# EAGLE board Module-WiFi-M0-v0.5-Board 2 (EAGLE 7.7.0)
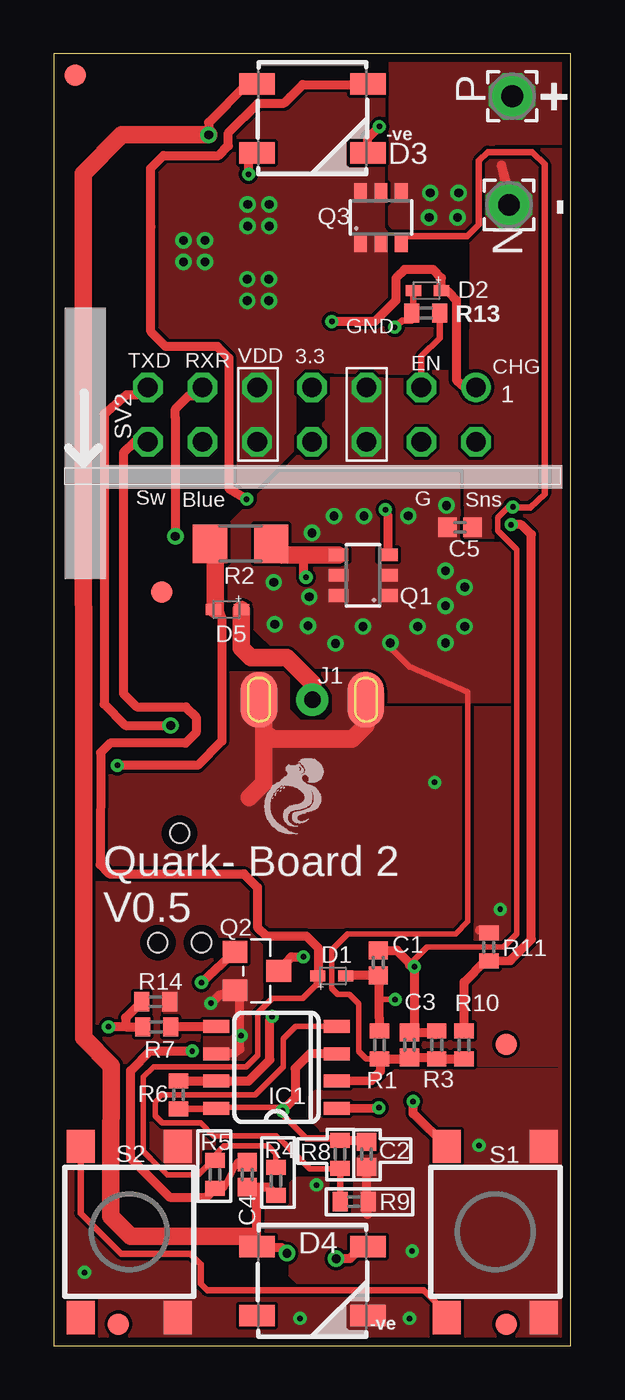
[diagram p0: board, top side]
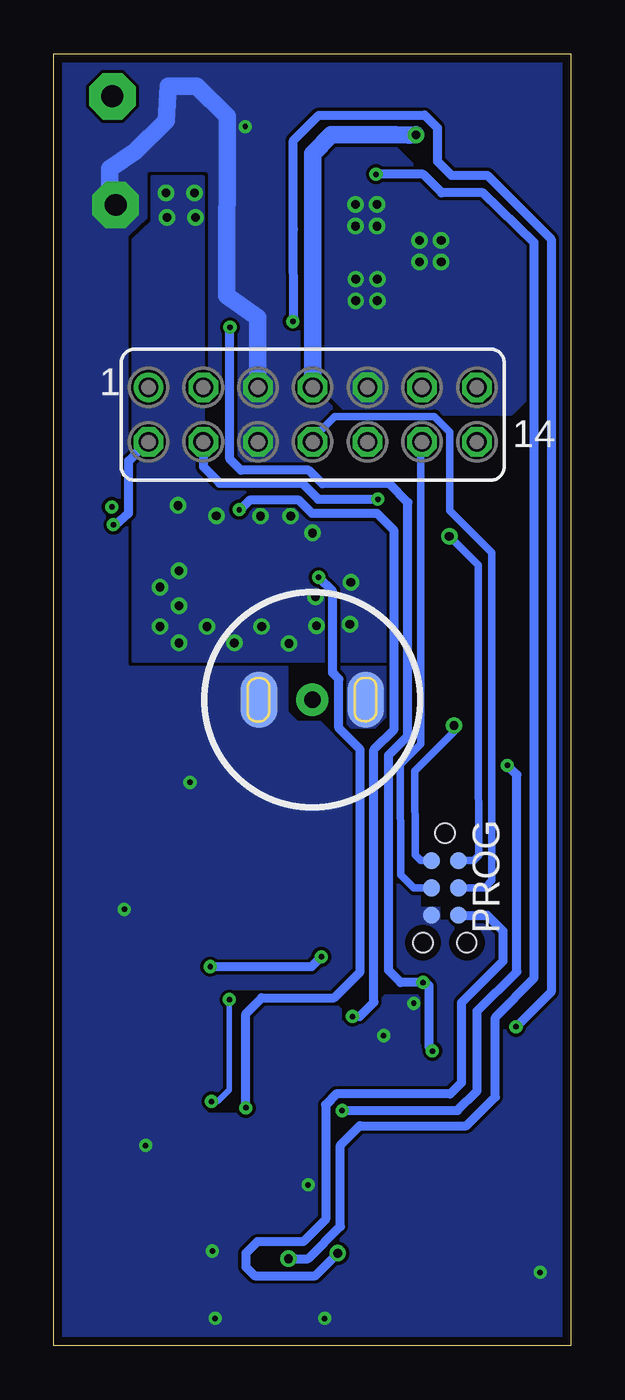
[diagram p1: board, bottom side, seen from below]

Size 24 x 60 mm. Coordinates in mm from the lower left corner, seen from the top.
Outline: 0,60 0,0 24,0 24,60 0,60
Copper layers (1*16): Top 0.0356mm / dielectric 1.5011mm / Bottom 0.0356mm
Design rules "oshpark-2layer-via-buried": minimum track width 6mil, minimum drill 10mil, track to track 6mil, track to pad 6mil, pad to pad 6mil, via to via 6mil, smd to smd 6mil, copper to edge 15mil, drill to drill 6mil, minimum pad ring 7mil, minimum via ring 7mil, stop-mask expansion 2.5mil, vias tented up to drill 16mil, thermal gap 10mil
tRestrict: 43 lines
bRestrict: 18 lines

## Footprints (pad centres in the part's own frame; a part is rotated, then mirrored left to right if it is on the bottom)
0402-CAP = smd 0.85 x 0.9: 1 -0.58,0; 2 0.58,0
SOD523 = smd 0.7 x 0.5: A 0.7,0; C -0.6,0
WS2812B = smd 1.651 x 1: 1 -2.577,1.6; 2 -2.577,-1.6; 3 2.577,-1.6; 4 2.577,1.6
SOIC-8-TIGHT = smd 0.6 x 1.2: 1 -1.905,-2.8; 2 -0.635,-2.8; 3 0.635,-2.8; 4 1.905,-2.8; 5 1.905,2.8; 6 0.635,2.8; 7 -0.635,2.8; 8 -1.905,2.8
CONN-MAG = smd 1.7 x 2.6 bottom: GND@1 -2.475,0; GND@4 2.475,0 | smd 1.7 x 2.6: GND@2 2.475,0; GND@3 -2.475,0 | drill 0.762 pad 1.5: POS 0,0
2,15/1,0 = drill 1.016 pad 2.159 octagon: 1 0,0
TC2030-MCP-NL = smd 0.787 x 0.787: 1 1.27,-0.635; 2 1.27,0.635; 3 2.54,-0.635; 4 2.54,0.635; 5 3.81,-0.635; 6 3.81,0.635 | hole 0.889: 0,0; 5.08,-1.016; 5.08,1.016
SOT23-6 = smd 0.6 x 0.9: 1 -0.95,-1.15; 2 0,-1.15; 3 0.95,-1.15; 4 0.95,1.15; 5 0,1.15; 6 -0.95,1.15
SOT-23 = smd 1.016 x 1.143: 1 -0.889,-1.016; 2 0.889,-1.016; 3 0,1.016
R0402 = smd 0.7 x 0.9: 1 -0.65,0; 2 0.65,0
R1206 = smd 1.6 x 1.803: 1 -1.422,0; 2 1.422,0
TACTILE_SWITCH_TALL = smd 1.55 x 1.3: A1 -3.975,-2.25; A2 3.975,-2.25; B1 -3.975,2.25; B2 3.975,2.25
FE07-2 = drill 0.914: 1 -7.62,1.27 | drill 0.914 octagon: 2 -7.62,-1.27; 3 -5.08,1.27; 4 -5.08,-1.27; 5 -2.54,1.27; 6 -2.54,-1.27; 7 0,1.27; 8 0,-1.27; 9 2.54,1.27; 10 2.54,-1.27; 11 5.08,1.27; 12 5.08,-1.27; 13 7.62,1.27; 14 7.62,-1.27
FIDUCIAL = smd 1 x 1: P$1 0,0

## Placement (x,y rotation side)
C1  0.1uF  [0402-CAP]  15.06,17.78 90 top
C2  0.1uF  [0402-CAP]  14.51,8.89 270 top
C3  0.1uF  [0402-CAP]  16.51,13.97 90 top
C4  0.1uF  [0402-CAP]  8.98,7.95 90 top
C5  0.1uF  [0402-CAP]  18.85,38.01 0 top
D1  PMEG3005EB  [SOD523]  12.95,17.17 180 top
D2  PMEG3005EB  [SOD523]  17.3,49 0 top
D3  [WS2812B]  12,57 0 top
D4  [WS2812B]  12,3 0 top
D5  PMEG3005EB  [SOD523]  8.01,34.19 0 top
IC1  BQ2057WSNTR  [SOIC-8-TIGHT]  10.34,12.93 90 top
J1  CONN-CIR_MAG  [CONN-MAG]  12,30 0 bottom
N  WIREPAD2,15/1,0  [2,15/1,0]  21.13,52.98 270 top
P  WIREPAD2,15/1,0  [2,15/1,0]  21.28,58.03 270 top
PROG  [TC2030-MCP-NL]  5.84,23.8 270 bottom
Q1  IRLTS2242-PMOS  [SOT23-6]  14.36,35.78 90 top
Q2  2N7002-NMOS  [SOT-23]  9.42,17.4 270 top
Q3  IRLTS2242-PMOS  [SOT23-6]  15.19,52.39 0 top
R1  30k  [R0402]  15.11,13.97 270 top
R2  0.62E, 0.5W  [R1206]  8.67,37.24 0 top
R3  300k  [R0402]  17.78,13.97 270 top
R4  300k  [R0402]  10.32,7.64 270 top
R5  300k  [R0402]  7.48,7.95 90 top
R6  3k  [R0402]  5.79,11.65 270 top
R7  3k  [R0402]  4.78,14.81 180 top
R8  3k  [R0402]  13.29,8.89 270 top
R9  3k  [R0402]  13.95,6.7 0 top
R10  30k  [R0402]  19.05,13.97 270 top
R11  3k  [R0402]  20.2,18.52 270 top
R13  3k  [R0402]  17.27,47.95 0 top
R14  1k  [R0402]  4.72,15.98 0 top
S1  On/Off Sw  [TACTILE_SWITCH_TALL]  20.5,5.28 90 top
S2  On/Off Sw  [TACTILE_SWITCH_TALL]  3.5,5.28 90 top
SV2  [FE07-2]  11.98,43.24 0 bottom
U$2  [OCTO_LOGO]  9.37,23.57 0 top
U$3  FIDUCIAL  [FIDUCIAL]  3,1 0 top
U$4  FIDUCIAL  [FIDUCIAL]  1,59 0 top
U$6  FIDUCIAL  [FIDUCIAL]  21,1 0 top
U$7  FIDUCIAL  [FIDUCIAL]  5,35 0 top
U$8  FIDUCIAL  [FIDUCIAL]  21,14 0 top

## Library data of the parts
C1-C5 = 1_ZeroUI; PROD_ID: CAP-12416
D1 D2 D5 = diode
D3 D4 = SparkFun-LED; PROD_ID: DIO-12503
IC1 = 1_ZeroUI; DATASHEETURL: http://www.ti.com/lit/ds/symlink/bq2057c.pdf
J1 Q1 Q3 U$2-U$4 U$6-U$8 = 1_ZeroUI
N P = wirepad
PROG = tag-connect
Q2 = 1_ZeroUI; MPN: 2N7002,215
R1-R11 R13 R14 = rcl
S1 S2 = 1_ZeroUI; PROD_ID: SWCH-11966
SV2 = con-lsta; OC_FARNELL: unknown; OC_NEWARK: unknown

## Nets
3.3V: C4.1 D3.1 D4.1 PROG.6 R4.2 SV2.7
12V: C2.1 D5.C IC1.3 IC1.8 R2.1 R6.2 R8.1
/RST: PROG.4 SV2.8
CHG_ON: D2.A R7.2 R14.1 SV2.1
GND: C2.2 C5.2 D3.3 D4.3 IC1.6 J1.GND@1 J1.GND@2 J1.GND@3 J1.GND@4 N.1 PROG.5 Q2.2 R9.2 R11.1 R14.2 S1.A1 S1.A2 S2.A1 S2.A2 SV2.5 SV2.6
LED-G: D3.4 SV2.4
N$1: D3.2 D4.4
N$4: C1.1 D1.C R1.1 S1.B1 S1.B2 S2.B1 S2.B2
N$5: C1.2 C3.2 Q2.3 Q3.3 R3.1
N$6: IC1.5 R7.1
N$7: D5.A J1.POS
N$8: R13.2 SV2.3
N$10: IC1.1 Q1.4 R2.2
N$13: IC1.7 Q1.3 R6.1
PROGL: PROG.3 SV2.12
PWR_EN: C4.2 D2.C Q2.1 R5.1 R13.1
RXD: PROG.2 SV2.11
SW_INT: D1.A R4.1 R5.2 SV2.14
TS1: IC1.4 R8.2 R9.1
TXD: PROG.1 SV2.13
V_BATT: C3.1 C5.1 IC1.2 P.1 Q1.1 Q1.2 Q1.5 Q1.6 Q3.4 R1.2 R3.2 R10.2
VBATT_SENSE: R10.1 R11.2 SV2.2
VDD: Q3.1 Q3.2 Q3.5 Q3.6 SV2.9 SV2.10

## Tracks (layer width: path | path; a pad name or v marks a point on that pad's centre or on a via)
3.3V  (via drill 0.41)
  Top 0.305: 3.1,56.29 3.15,56.24
  Top 0.406: C4.1 9.42,7.37 | 9.42,7.37 9.94,7.37 R4.2 | 9.42,7.37 D4.1 10.25,4.55 10.56,4.55 v10.82,4.29 | D3.1 8.99,58.6 7.19,56.8 v7.19,56.24
  Top 0.813: v7.19,56.24 3.15,56.24 1.36,54.44 1.38,14.29 2.67,12.99 2.64,8.04 2.65,6.01 3.58,5.08 9.16,5.08 D4.1
  Bottom 0.305: 3.15,17.85 3.17,17.83
  Bottom 0.406: PROG.6 3.89,19.99 3.15,19.26 3.15,17.85 | 3.17,17.83 5.08,15.93 5.08,12.21 5.6,11.68 10.89,11.68 11.38,11.2 11.38,5.87 12.42,4.83 14.55,4.83 15.09,4.29 15.09,3.66 14.68,3.25 11.86,3.25 v10.82,4.29
  Bottom 0.813: SV2.7 11.99,45.33 11.99,55.37 11.12,56.24 8.16,56.24 7.49,56.23 v7.19,56.24
12V  (via drill 0.25)
  Top 0.254: 7.34,11.08 10.41,11.07 10.59,10.89 v10.62,10.92 10.67,10.68
  Top 0.305: 7.34,11.08 IC1.8 | 13.16,9.62 11.72,9.62 10.67,10.68 | R6.2 7.29,11.01
  Top 0.406: IC1.3 11.89,13.56 11.2,12.88 11.2,11.51 10.69,11 v10.62,10.92 | 7.5,34.19 D5.C 7.64,34.19 7.8,33.81 7.8,28.08 6.67,26.95 4.39,26.95 v2.95,26.95 | 7.37,37.28 R2.1 | 13.16,9.62 R8.1 14.44,9.54 C2.1 | 7.29,11.01 IC1.8
  Top 0.813: 7.5,34.19 7.5,34.98 7.49,36.52 7.52,37.06 7.37,37.28
  Bottom 0.406: v10.62,10.92 5.26,10.92 4.34,11.84 4.34,15.54 2.5,17.36 2.5,26.51 v2.95,26.95
/RST
  Bottom 0.305: SV2.8
  Bottom 0.356: SV2.8 11.99,42.14 10.97,43.16 6.34,43.16 5.61,42.44 5.61,38.79 3.66,36.85 3.66,21.6 4,21.26 PROG.4
CHG_ON  (via drill 0.25)
  Top 0.406: 3.33,14.81 R7.2 | SV2.1 19.05,44.51 18.69,44.85 18.69,48.56 18.33,48.94 D2.A 18,49.59 17.61,49.98 16.29,49.98 15.88,49.58 15.88,48.54 14.9,47.57 v12.9,47.57 | R14.1 3.33,15.23 3.33,14.81 | 3.33,14.81 v2.54,14.81
  Bottom 0.406: v2.54,14.81 0.91,16.43 0.91,51.39 3.88,54.36 5.55,54.35 6.2,55 6.2,56.56 6.79,57.15 11.7,57.15 12.88,55.97 12.88,51.84 12.86,47.71 v12.9,47.57
GND  (via drill 0.25)
  Top 0.406: R9.2 14.55,6.12 14.55,6.1 14.5,6.22 C2.2 14.64,8.18 | IC1.6 8.39,13.59 8.64,13.78 8.64,16.05 Q2.2 7.7,16.28 7.42,16 v7.29,15.9 | R11.1 19.76,19.29 | 9.75,29.77 J1.GND@4 | 21.23,53.24 20.78,54.84 N.1 | D3.3 14.58,56.08 v15.11,56.62
  Top 0.813: 9.07,25.45 9.75,26.14 9.75,28.55 | 9.75,29.77 9.75,28.55 | 9.75,28.55 10.13,28.17 13.84,28.17 14.48,28.8 J1.GND@3
  Bottom 0.406: 14.53,44.25 SV2.5 | v15.11,56.62 15.06,56.62 15.11,56.67
  Bottom 0.813: SV2.5 14.53,47.75 15.98,48.76 15.95,57.09 17.35,58.5 18.68,58.5 18.77,56.89 20.24,55.45 21.41,54.66 21.41,53.65
  other vias: 19.74,9.3 17.68,26.16 16.64,4.39 12.19,7.47 8.69,14.4 1.42,3.4 20.73,20.27 16.51,1.27 11.43,1.27
  pour Bottom (rank 6, no thermals): -35.56,68.58 73.66,68.58 73.66,-15.24 -35.56,-15.24
  pour Top (rank 6, no thermals): -19.05,39.95 9.7,39.95 12.7,42.95 12.7,45.21 19.37,45.21 19.41,49.16 19.41,49.18 19.43,66.04 34.29,66.04 34.29,-7.62 -19.05,-7.62
LED-G  (via drill 0.25)
  Top 0.254: 4.5,52.28 4.5,51.97
  Top 0.406: v8.95,39.32 8.13,39.82 8.13,45.88 7.59,46.41 5.63,46.41 5.19,46.41 4.5,47.1 4.5,51.96 4.5,51.97 4.5,54.69 5.08,55.27 7.64,55.27 8.1,55.73 8.1,56.33 9.48,57.71 10.69,57.71 10.97,57.99 11.55,58.57 14.55,58.57 D3.4
  Bottom 0.406: SV2.4 17.06,40.82 16.3,40.06 12.47,40.06 11.73,39.32 v8.95,39.32
N$1  (via drill 0.25, 0.41)
  Top 0.406: D4.4 14.58,4.67 13.92,4.22 13.74,4.04 v13.11,4.04 | v9.04,54.41 9.04,55.19 9.22,55.37 9.39,55.37 D3.2
  Bottom 0.406: v13.11,4.04 12.19,4.04 10.69,5.54 10.69,9.31 9.79,10.21 4.85,10.21 3.5,11.55 3.5,15.24 1.7,17.09 1.7,51.23 4.08,53.54 5.99,53.54 6.86,54.41 v9.04,54.41
N$4  (via drill 0.25)
  Top 0.254: v15.85,16.08 15.12,16.08 15.12,16.13 | 17.8,1.7 17.82,1 S1.B1
  Top 0.305: S2.B2 1.25,6.16 3.13,4.27 6.34,4.27 6.82,3.79 6.82,2.87 7.12,2.57 17.17,2.57 17.8,1.95 17.8,1.7
  Top 0.406: R1.1 15.12,15.2 15.12,16.13 15.12,16.82 C1.1 13.88,17.2 D1.C 13.56,17.18 | S1.B2 16.68,10.79 v16.68,11.34
  Bottom 0.254: v16.68,11.34 16.4,11.34 15.85,11.89 v15.85,16.08
N$5  (via drill 0.25)
  Top 0.254: 16.51,17.68 17.35,18.52 20.89,18.52 21.49,19.12 21.49,36.98 20.61,37.87 20.61,38.45 21.11,38.95 v21.31,38.95
  Top 0.305: Q3.3 16.02,51.51 16.61,51.53 19.19,51.53 19.74,52.07 19.74,55.03 20.14,55.44 22.22,55.43 22.78,54.87 22.78,39.56 22.12,38.93 21.31,38.93 v21.31,38.95
  Top 0.406: 17.71,14.55 C3.2 16.74,14.78 v16.74,17.6 16.51,17.68 16.51,17.78 15.93,18.36 C1.2 | Q2.3 11.02,18.06 v11.58,18.06
  Top 0.61: 17.71,14.55 R3.1
  Bottom 0.406: v11.58,18.06 12.04,17.6 v16.74,17.6
N$6
  Top 0.406: R7.1 5.59,14.77 5.66,14.83 IC1.5
N$7
  Top 0.406: 12.01,30.01 J1.POS
  Top 0.813: D5.A 8.71,32.41 9.15,31.96 10.81,31.96 12.01,30.75 12.01,30.01
N$8
  Top 0.305: R13.2 17.93,46.8 17.07,45.95 SV2.3
N$10  (via drill 0.25)
  Top 0.406: IC1.1 v15.09,11.05 | v11.71,35.69 11.61,35.79 11.61,36.73
  Top 0.61: 10.61,36.73 R2.2
  Top 0.813: Q1.4 11.61,36.73 10.61,36.73
  Bottom 0.406: v15.09,11.05 15.09,15.42 14.35,16.15 10.99,16.15 9.78,17.36 9.78,27.68 10.77,28.68 10.77,30.96 10.98,31.17 11.06,31.25 11.06,35.04 v11.71,35.69
N$13  (via drill 0.25)
  Top 0.406: R6.1 7.19,12.3 7.29,12.34 IC1.7 9.04,12.29 10.03,13.28 10.03,15.16 10.13,15.27 v10.13,15.29 | Q1.3 15.51,38.55 v15.39,38.83
  Bottom 0.406: v10.13,15.29 9.8,15.29 9.14,15.95 9.14,27.69 8.21,28.62 8.2,37.86 8.99,38.65 12.01,38.65 12.62,39.27 14.91,39.27 15.35,38.83 v15.39,38.83
PROGL
  Bottom 0.356: SV2.12 6.9,41.74 6.96,41.5 6.96,27.95 7.92,26.99 7.9,21.87 7.29,21.26 PROG.3
PWR_EN  (via drill 0.25)
  Top 0.305: D2.C 16.68,47.96 16.55,47.83 R13.1 16.61,47.87 16.61,47.6 16.18,47.6 v15.82,47.3 | R5.1 7.9,7.32 8.51,8.53 C4.2
  Top 0.406: v6.43,13.69 4.48,13.69 3.56,12.77 3.56,8.71 5.37,6.9 7.08,6.9 R5.1 | Q2.1 v6.86,16.87
  Bottom 0.406: v6.43,13.69 6.58,13.89 6.58,16.71 6.76,16.89 v6.86,16.87 7.89,16.87 8.46,17.43 8.46,27.43 7.58,28.31 7.57,39.17 8.43,40.03 11.53,40.03 12.17,40.66 15.32,40.66 15.82,41.17 v15.82,47.3
RXD  (via drill 0.41)
  Top 0.406: 6.88,44.18 SV2.11 6.86,44.12 6.26,44.12 5.64,43.49 5.64,43.07 5.64,40.05 v5.64,37.59
  Bottom 0.356: PROG.2 4.5,22.53 4.27,22.76 4.29,27.91 4.28,36.26 5.59,37.57 v5.64,37.59
SW_INT
  Top 0.254: 12.25,16.83 11.56,16.13 10.14,16.13 9.47,15.46 9.47,13.49 8.94,12.95 4.64,12.95 4.16,12.48 4.16,9.02 4.5,8.68 5.26,7.92 6.7,7.92 7.16,8.39 7.16,8.46 7.32,8.61 7.47,8.61 R5.2 | 7.48,8.68 R5.2 | R5.2 7.48,8.85 7.9,9.27 9.96,9.27 10.31,8.91 R4.1
  Top 0.406: SV2.14 3.75,41.98 3.23,41.46 3.23,30.3 3.85,29.67 6.13,29.67 6.6,29.2 6.6,28.48 6.12,27.99 2.62,27.99 2.17,27.54 2.15,22.35 2.58,21.92 8.82,21.92 9.45,21.29 9.45,19.43 9.85,19.02 11.73,19.02 12.27,18.48 12.27,17.18 D1.A 12.25,16.83
TS1
  Top 0.254: IC1.4 11.23,14.83 10.64,14.25 10.64,12.96 9.34,11.66 6.5,11.66 6.38,11.65 5.02,11.65 4.7,11.33 4.7,10.68 5.04,10.34 6.81,10.34 7.41,9.75 10.34,9.75 10.7,9.4 11.88,8.21 13.19,8.21
  Top 0.305: 13.19,8.21 R8.2 R9.1
TXD  (via drill 0.41)
  Top 0.406: v5.42,28.8 3.32,28.81 2.34,29.79 2.34,43.28 3.38,44.17 4.36,44.17 SV2.13
  Bottom 0.356: v5.42,28.8 5.46,28.8 5.44,28.78 5.44,28.5 7.24,26.7 7.21,22.78 6.96,22.53 PROG.1
V_BATT  (via drill 0.41)
  Top 0.254: 16.51,31.55 19.23,30.35 19.23,25.7 19.23,19.7 18.66,19.13 13.64,19.13 12.9,18.39 12.9,16.59 13.19,16.31 13.72,16.31 14.15,15.88 14.15,13.66 14.49,13.32 R1.2
  Top 0.305: 15.49,32.57 16.51,31.55
  Top 0.406: IC1.2 14.74,12.32 15.18,12.75 15.18,13.26 R1.2 16.44,13.32 | C3.1 17.71,13.39 | R3.2 R10.2
  Top 0.61: 16.44,13.32 C3.1 | 17.71,13.39 R3.2
  other vias: 18.19,32.64 15.62,32.64 10.21,35.46 18.19,34.37 14.4,38.53 13.08,32.61 14.35,33.4 13,38.53 18.19,35.99 16.46,38.54 11.81,33.43 18.23,39.02 11.99,37.74 11.86,34.78 16.89,33.4 19.07,35.23 10.26,33.51 19.07,33.4 17.42,52.4 18.75,52.4 18.8,53.54 17.48,53.54
  pour Top (rank 5, no thermals): 12.79,29.95 8.11,34.55 8.09,38.04 10.52,40.49 18.77,40.49 18.8,37.23 21.41,37.23 21.41,29.95
  pour Bottom (no thermals): 8.4,39.7 16.12,39.77 17.07,40.73 17.07,54.27 17.1,54.29 19.43,54.3 19.43,52.2 20.32,51.36 20.32,31.8 8.38,31.8
  pour Top (rank 2, no thermals): 19.45,51.56 16.14,51.56 15.62,52.08 15.65,59.69 23.88,59.74 23.88,55.88 20.44,55.88 19.45,54.89
VBATT_SENSE  (via drill 0.25)
  Top 0.406: R10.1 19.05,16.88 20.04,17.87 R11.2 21.19,17.89 22.17,18.87 22.17,37.68 21.7,38.13 v21.23,38.13
  Bottom 0.406: v21.23,38.13 21.13,38.13 20.52,38.66 20.52,41.09 19.91,41.7 19.62,41.7 SV2.2
VDD  (via drill 0.41)
  other vias: 9.98,49.53 9,52 8.98,49.53 10,52 7.02,50.33 9.98,48.53 8.98,48.53 10,53 9,53 6.02,51.33 6.02,50.33 7.02,51.33
  pour Top (rank 4, no thermals): -10.16,60.96 -10.16,39.95 9.42,39.95 11.15,41.68 11.15,44.61 11.82,45.27 19.08,45.13 19.02,51.28 16.24,51.28 15.47,52.06 15.47,52.4 15.44,52.43 15.49,60.81
  pour Bottom (no thermals): 8.51,43.28 10.19,43.25 11.86,44.85 11.99,54.58 12.67,56.13 8.56,56.13 8.56,56.04 5.83,53.31 2.62,53.31 1.98,52.68 1.98,44.09 2.79,43.28

## Text on the board
tPlace: + | -
tNames: -ve | GND | VDD | 3.3 | TXD | RXR | EN | CHG | 1 | Sw | Blue | G | Sns | Quark- Board 2 / V0.5 | -ve
Reference: Battery / Terminal | To Drill Center | Top PCB / Mate | Rx | Tx | Module PCB- II / Bottom PCB | switch | switch | switch
tDocu: /RST